# Altium PCB HU_revB.PcbDoc (part 2 of 5)
Units mm, origin at the board's own origin, x right, y up, seen from the top; angles counter-clockwise.
Board outline 164 x 90 mm, 6 copper layers (TOP, GND1, INT SIG, PWR + INT SIG, GND2, BOT), stack 1.538 mm thick; 404 components, 380 nets, 1687 pads, 328 vias.
Unrouted connection lines stored in the file: 342.
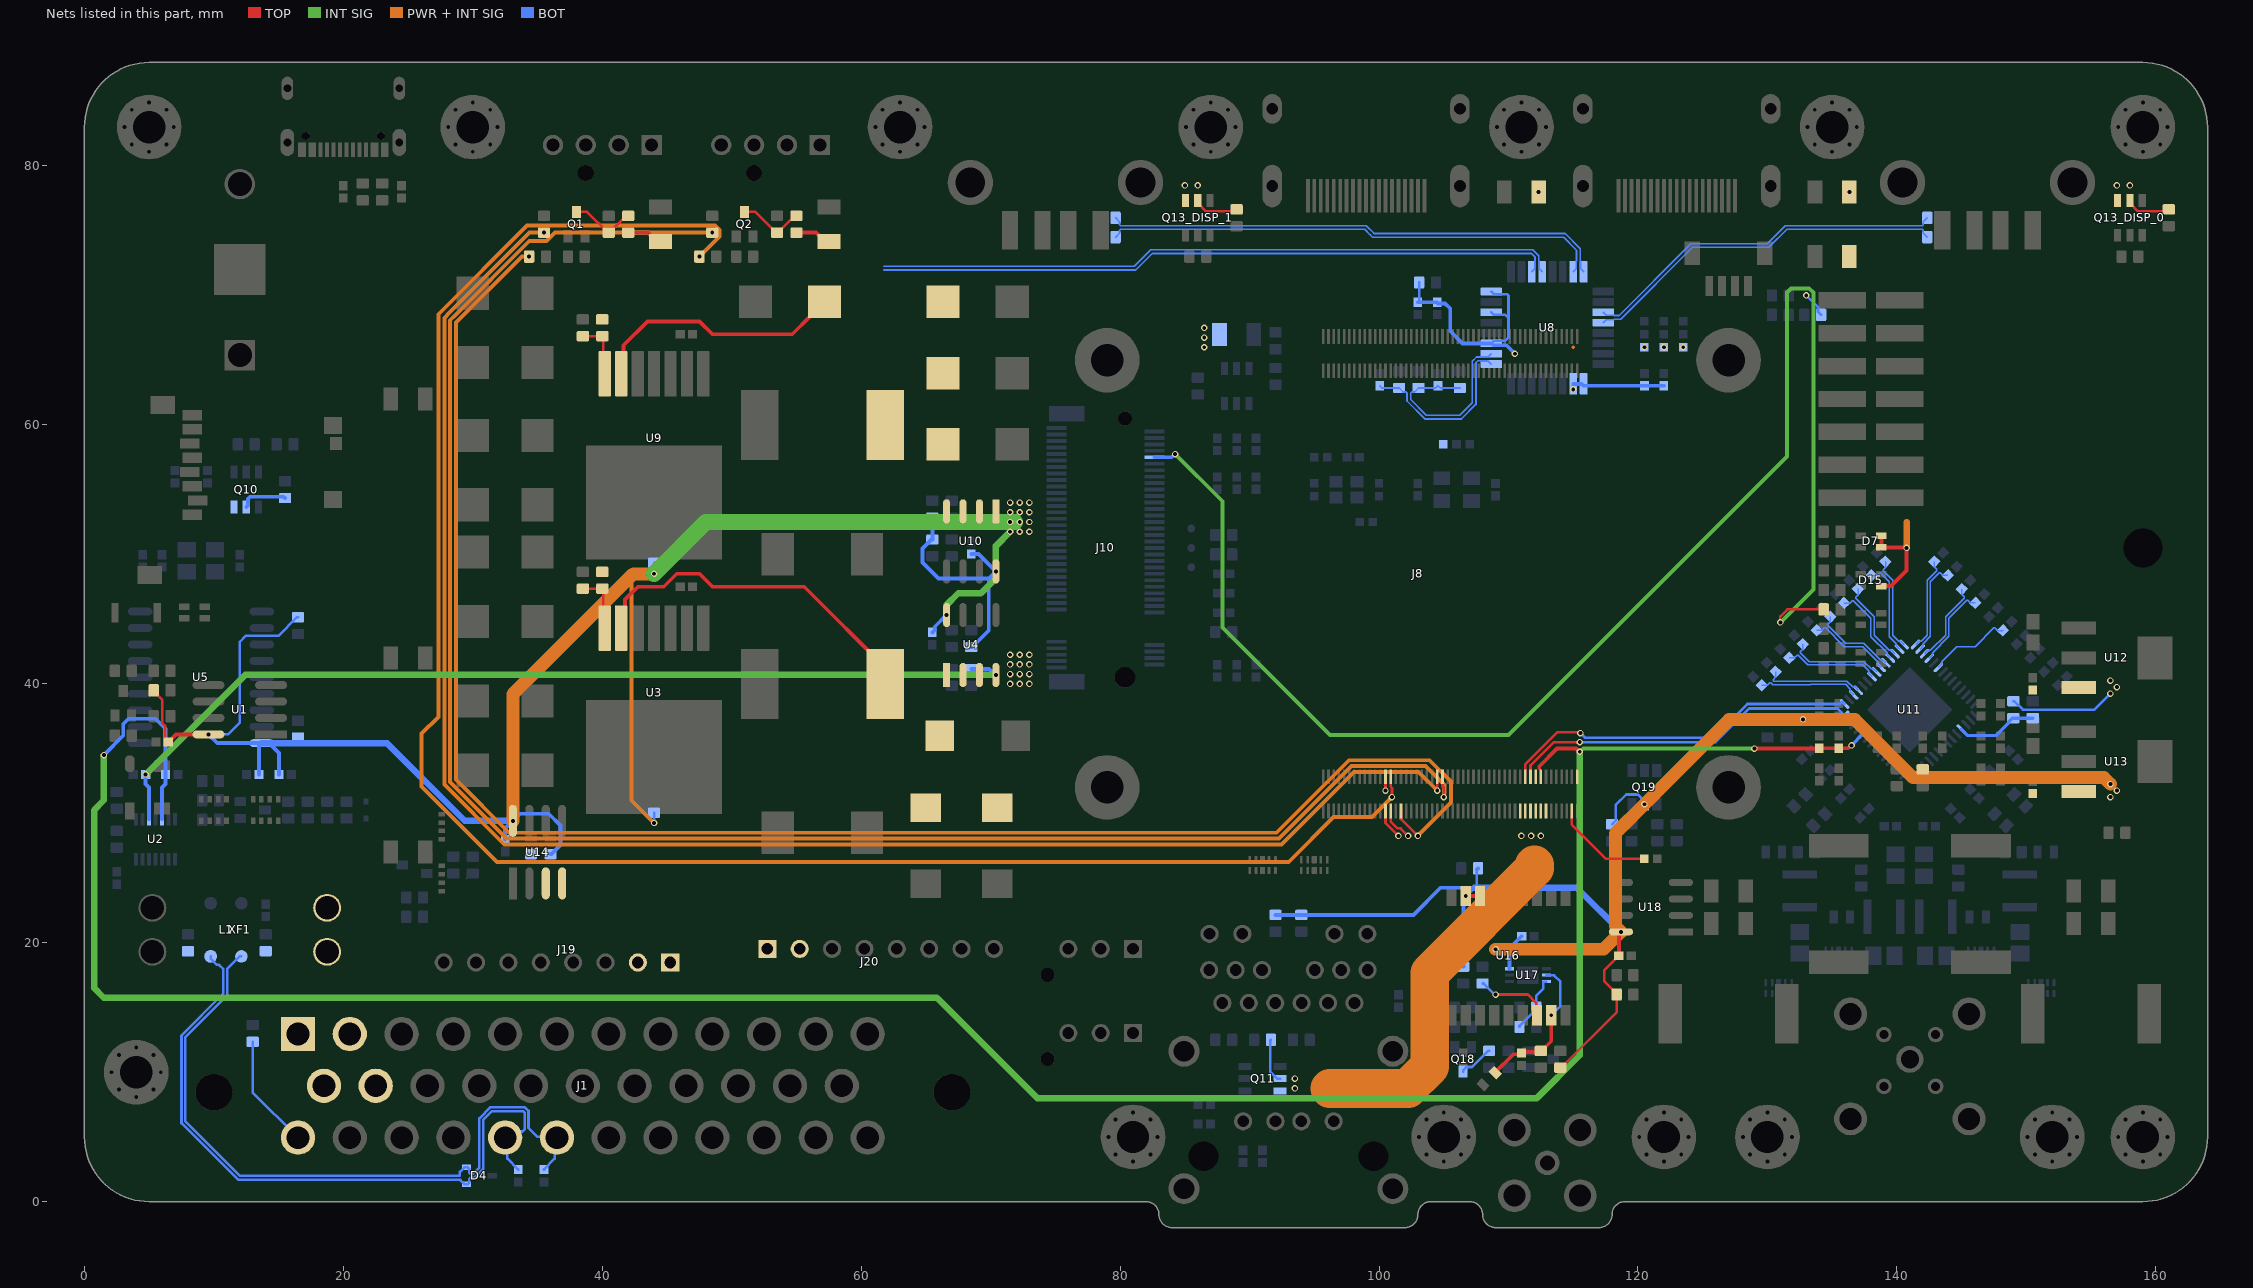
[diagram p6: the nets of this part, all layers, seen from the top]

## Footprints (in the part's own frame and the unit in brackets; to place one, negate y for a bottom-side part, rotate by r counter-clockwise, add the part's x,y. Pads: shape width x height; smd on the part's side, far side on the other; paste and mask are expansions set on the pad) (continued)
MAX-M10M-00B-Footprint-1 [mm]
  rect 1.55x0.8 smd: 1(-4.6,4.4) 2(-4.6,3.3) 3(-4.6,2.2) 4(-4.6,1.1) 5(-4.6,0) 6(-4.6,-1.1) 7(-4.6,-2.2) 8(-4.6,-3.3) 9(-4.6,-4.4) 10(4.6,-4.4) 11(4.6,-3.3) 12(4.6,-2.2) 13(4.6,-1.1) 14(4.6,0) 15(4.6,1.1) 16(4.6,2.2) 17(4.6,3.3) 18(4.6,4.4)
  silkscreen extent -5.26,4.91 -5.16,5.01, body extent -4.85,-5.35 4.85,5.05, height 2.7
MOLX-473521001_V [mm] "SMD, 8-Leads, Body 15.2x14mm, Pitch 1.1mm"
  rect 0.8x1.5 smd: 1(1.94,-3.66) 2(0.84,-3.26) 3(-0.26,-3.66) 4(-1.36,-3.86) 5(-2.46,-3.66) 6(-3.56,-3.86) 7(-4.66,-3.66) 8(-5.76,-3.66)
  rect 1x0.95 smd: 9(-3.56,7.425)
  rect 1.3x1.4 smd: 10(-4.95,7.2) 11(0.75,7.2)
  rect 1.4x1.9 smd: 12(6.6,-6.95) 13(-6.55,-5.95)
  silkscreen extent -7,-7.6 7.77,7.6, body extent -7.05,-7.6 7.05,7.6, height 1.85
MTC16_L [mm] "TSOP, 16-Leads, Body 5x4.4mm, Pitch 0.65mm, IPC High Density"
  oval 1.4x0.35 smd: 1(-2.8,2.275) 2(-2.8,1.625) 3(-2.8,0.975) 4(-2.8,0.325) 5(-2.8,-0.325) 6(-2.8,-0.975) 7(-2.8,-1.625) 8(-2.8,-2.275) 9(2.8,-2.275) 10(2.8,-1.625) 11(2.8,-0.975) 12(2.8,-0.325) 13(2.8,0.325) 14(2.8,0.975) 15(2.8,1.625) 16(2.8,2.275)
  silkscreen extent -2.92,-2.55 1.7,3.12, body extent -2.25,-2.55 2.25,2.55, height 1.1
"New footprint 1" [mm]
  round 0.6 smd paste-1: 1(0,0)
ONSC-SOD-123-2-425-04_V [mm] "SOD, 2-Leads, Body 2.69x1.6mm"
  rect 0.91x1.22 smd: 1(-1.635,0) 2(1.635,0)
  silkscreen extent -1.76,-0.8 0.78,1.29, body extent -1.35,-0.8 1.35,0.8, height 1.35
ONSC-SOD-523-2-502-01_V [mm] "SOD, 2-Leads, Body 1.2x0.8mm"
  rect 0.48x0.4 smd: 1(-0.66,0) 2(0.66,0)
  silkscreen extent -0.75,-0.4 0.07,0.65, body extent -0.6,-0.4 0.6,0.4, height 0.7
"PTHV6 M2" [mm]
  round 0.5 hole 0.3: 1(-1.9,0) 1(-1.344,-1.344) 1(-1.344,1.344) 1(0,-1.9) 1(0,1.9) 1(1.344,-1.344) 1(1.344,1.344) 1(1.9,0)
  round 5 hole 2.5: 1(0,0)
R0603B [mm] "Chip Resistor, 0603, 2-Leads, Body 1.58x0.85mm, IPC Medium Density"
  rrect25% 0.8x0.95 smd: 1(-0.65,0) 2(0.65,0)
  silkscreen extent -0.2,-0.7 0.2,0.7, body extent -0.82,-0.48 0.82,0.48, height 0.5
RESC1005X40X25ML05T05 [mm] "Chip Resistor, 2-Leads, Body 1.00x0.50mm, IPC Low Density"
  rect 0.65x0.65 smd: 1(-0.5,0) 2(0.5,0)
  body extent -0.53,-0.27 0.53,0.28, height 0.4
RESC1608X90X30ML15T20 [mm] "Chip Resistor, 2-Leads, Body 1.60x0.80mm, IPC Low Density"
  rect 0.95x1.05 smd: 1(-0.7,0) 2(0.7,0)
  body extent -0.88,-0.48 0.87,0.48, height 0.9
"RPI CM5 W_ COOLER-Footprint-1" [mm]
  rect 0.2x1.14 smd paste-2 mask+0: 1(31.3,34.82) 2(31.3,32.18) 3(30.9,34.82) 4(30.9,32.18) 5(30.5,34.82) 6(30.5,32.18) 7(30.1,34.82) 8(30.1,32.18) 9(29.7,34.82) 10(29.7,32.18) 11(29.3,34.82) 12(29.3,32.18) 13(28.9,34.82) 14(28.9,32.18) 15(28.5,34.82) 16(28.5,32.18) 17(28.1,34.82) 18(28.1,32.18) 19(27.7,34.82) 20(27.7,32.18) 21(27.3,34.82) 22(27.3,32.18) 23(26.9,34.82) 24(26.9,32.18) 25(26.5,34.82) 26(26.5,32.18) 27(26.1,34.82) 28(26.1,32.18) 29(25.7,34.82) 30(25.7,32.18) 31(25.3,34.82) 32(25.3,32.18) 33(24.9,34.82) 34(24.9,32.18) 35(24.5,34.82) 36(24.5,32.18) 37(24.1,34.82) 38(24.1,32.18) 39(23.7,34.82) 40(23.7,32.18) 41(23.3,34.82) 42(23.3,32.18) 43(22.9,34.82) 44(22.9,32.18) 45(22.5,34.82) 46(22.5,32.18) 47(22.1,34.82) 48(22.1,32.18) 49(21.7,34.82) 50(21.7,32.18) 51(21.3,34.82) 52(21.3,32.18) 53(20.9,34.82) 54(20.9,32.18) 55(20.5,34.82) 56(20.5,32.18) 57(20.1,34.82) 58(20.1,32.18) 59(19.7,34.82) 60(19.7,32.18) 61(19.3,34.82) 62(19.3,32.18) 63(18.9,34.82) 64(18.9,32.18) 65(18.5,34.82) 66(18.5,32.18) 67(18.1,34.82) 68(18.1,32.18) 69(17.7,34.82) 70(17.7,32.18) 71(17.3,34.82) 72(17.3,32.18) 73(16.9,34.82) 74(16.9,32.18) 75(16.5,34.82) 76(16.5,32.18) 77(16.1,34.82) 78(16.1,32.18) 79(15.7,34.82) 80(15.7,32.18) 81(15.3,34.82) 82(15.3,32.18) 83(14.9,34.82) 84(14.9,32.18) 85(14.5,34.82) 86(14.5,32.18) 87(14.1,34.82) 88(14.1,32.18) 89(13.7,34.82) 90(13.7,32.18) 91(13.3,34.82) 92(13.3,32.18) 93(12.9,34.82) 94(12.9,32.18) 95(12.5,34.82) 96(12.5,32.18) 97(12.1,34.82) 98(12.1,32.18) 99(11.7,34.82) 100(11.7,32.18) 101(31.3,0.82) 102(31.3,-1.82) 103(30.9,0.82) 104(30.9,-1.82) 105(30.5,0.82) 106(30.5,-1.82) 107(30.1,0.82) 108(30.1,-1.82) 109(29.7,0.82) 110(29.7,-1.82) 111(29.3,0.82) 112(29.3,-1.82) 113(28.9,0.82) 114(28.9,-1.82) 115(28.5,0.82) 116(28.5,-1.82) 117(28.1,0.82) 118(28.1,-1.82) 119(27.7,0.82) 120(27.7,-1.82) 121(27.3,0.82) 122(27.3,-1.82) 123(26.9,0.82) 124(26.9,-1.82) 125(26.5,0.82) 126(26.5,-1.82) 127(26.1,0.82) 128(26.1,-1.82) 129(25.7,0.82) 130(25.7,-1.82) 131(25.3,0.82) 132(25.3,-1.82) 133(24.9,0.82) 134(24.9,-1.82) 135(24.5,0.82) 136(24.5,-1.82) 137(24.1,0.82) 138(24.1,-1.82) 139(23.7,0.82) 140(23.7,-1.82) 141(23.3,0.82) 142(23.3,-1.82) 143(22.9,0.82) 144(22.9,-1.82) 145(22.5,0.82) 146(22.5,-1.82) 147(22.1,0.82) 148(22.1,-1.82) 149(21.7,0.82) 150(21.7,-1.82) 151(21.3,0.82) 152(21.3,-1.82) 153(20.9,0.82) 154(20.9,-1.82) 155(20.5,0.82) 156(20.5,-1.82) 157(20.1,0.82) 158(20.1,-1.82) 159(19.7,0.82) 160(19.7,-1.82) 161(19.3,0.82) 162(19.3,-1.82) 163(18.9,0.82) 164(18.9,-1.82) 165(18.5,0.82) 166(18.5,-1.82) 167(18.1,0.82) 168(18.1,-1.82) 169(17.7,0.82) 170(17.7,-1.82) 171(17.3,0.82) 172(17.3,-1.82) 173(16.9,0.82) 174(16.9,-1.82) 175(16.5,0.82) 176(16.5,-1.82) 177(16.1,0.82) 178(16.1,-1.82) 179(15.7,0.82) 180(15.7,-1.82) 181(15.3,0.82) 182(15.3,-1.82) 183(14.9,0.82) 184(14.9,-1.82) 185(14.5,0.82) 186(14.5,-1.82) 187(14.1,0.82) 188(14.1,-1.82) 189(13.7,0.82) 190(13.7,-1.82) 191(13.3,0.82) 192(13.3,-1.82) 193(12.9,0.82) 194(12.9,-1.82) 195(12.5,0.82) 196(12.5,-1.82) 197(12.1,0.82) 198(12.1,-1.82) 199(11.7,0.82) 200(11.7,-1.82)
  round 5 hole 2.5: 201(0,0) 202(0,33) 203(48,33) 204(48,0)
  silkscreen extent 10.2,-3.1 32.8,35, body extent -3.5,-3.5 51.5,36.5, height 5.01
SISH615ADN-T1-GE3-Footprint-1 [mm]
  rect 0.35x0.5 smd paste+0 mask+0: 1(-0.937,-1.4) 2(-0.288,-1.4) 3(0.363,-1.4) 4(1.012,-1.4)
  round 0.025 smd mask+0: 5-6-7-8(0.038,0.51)
  TOP region: -1.187,-0.63 -1.187,-0.215 -1.568,-0.215 -1.568,0.215 -1.187,0.215 -1.187,1.35 -1.137,1.35 -1.137,1.65 -0.737,1.65 -0.737,1.35 -0.487,1.35 -0.487,1.65 -0.088,1.65 -0.088,1.35 0.163,1.35 0.163,1.65 0.563,1.65 0.563,1.35 0.813,1.35 0.813,1.65 1.212,1.65 1.212,1.35 1.262,1.35 1.262,0.215 1.643,0.215 1.643,-0.215 1.262,-0.215 1.262,-0.63
  silkscreen extent -1.51,-2.37 1.59,-1.01, body extent -1.67,-1.75 1.74,1.75, height 0.25
SOT95P284X110-6N [mm] "SOT23, 6-Leads, Body 2.98x2.84mm, Pitch 0.95mm, IPC Medium Density"
  rect 1x0.55 smd: 1(-1.35,0.95) 2(-1.35,0) 3(-1.35,-0.95) 4(1.35,-0.95) 5(1.35,0) 6(1.35,0.95)
  silkscreen extent -1.47,-1.55 0.45,1.9, body extent -0.85,-1.55 0.85,1.55, height 1.1
SOT-223_M [mm] "SOT223, 4-Leads, Body 6.5x3.5mm, Pitch 2.3mm, Lead Span 7mm, IPC Low Density"
  rect 2.7x1 smd: 1(-2.95,2.3) 2(-2.95,0) 3(-2.95,-2.3)
  rect 2.7x3.3 smd: 4(2.95,0)
  silkscreen extent -3.07,-3.35 1.3,3.47, body extent -1.85,-3.35 1.85,3.35, height 1.8
T495D106M035ATE260-Footprint-1 [mm]
  rect 2.56x2.5 smd paste+0 mask+0: 1(-2.672,0) 2(2.672,0)
  silkscreen extent -5.23,-2.28 3.93,2.28, body extent -3.8,-2.15 3.8,2.15, height 3.15
T495D337K010ATE150-Footprint-1 [mm]
  rect 2.56x2.5 smd paste+0 mask+0: 1(-2.672,0) 2(2.672,0)
  silkscreen extent -5.2,-2.28 3.93,2.28, body extent -3.8,-2.15 3.8,2.15, height 3.15
T495D475K050ATE300-Footprint-1 [mm]
  rect 2.56x2.5 smd paste+0 mask+0: 1(-2.672,0) 2(2.672,0)
  silkscreen extent -5.2,-2.28 3.93,2.28, body extent -3.8,-2.15 3.8,2.15, height 3.15
TCAN1146DYYRQ1-Footprint-1 [mil]
  rect 38.5x12 smd paste+0 mask+0: 1(-60.75,59.07) 2(-60.75,39.38) 3(-60.75,19.69) 4(-60.75,0) 5(-60.75,-19.69) 6(-60.75,-39.38) 7(-60.75,-59.07) 8(60.75,-59.07) 9(60.75,-39.38) 10(60.75,-19.69) 11(60.75,0) 12(60.75,19.69) 13(60.75,39.38) 14(60.75,59.07)
  silkscreen extent -47,-90 100,90, body extent -66,-84 66,84, height 43
VF0032A_M [mm] "QFP, 32-Leads, Body 7x7mm, Pitch 0.8mm, IPC Low Density"
  rrect17% 1.65x0.6 smd: 1(-4.325,2.8) 2(-4.325,2) 3(-4.325,1.2) 4(-4.325,0.4) 5(-4.325,-0.4) 6(-4.325,-1.2) 7(-4.325,-2) 8(-4.325,-2.8) 17(4.325,-2.8) 18(4.325,-2) 19(4.325,-1.2) 20(4.325,-0.4) 21(4.325,0.4) 22(4.325,1.2) 23(4.325,2) 24(4.325,2.8)
  rrect17% 0.6x1.65 smd: 9(-2.8,-4.325) 10(-2,-4.325) 11(-1.2,-4.325) 12(-0.4,-4.325) 13(0.4,-4.325) 14(1.2,-4.325) 15(2,-4.325) 16(2.8,-4.325) 25(2.8,4.325) 26(2,4.325) 27(1.2,4.325) 28(0.4,4.325) 29(-0.4,4.325) 30(-1.2,4.325) 31(-2,4.325) 32(-2.8,4.325)
  silkscreen extent -4.45,-3.1 3.1,3.77, body extent -4.51,-4.51 4.51,4.51, height 1.6
WE-TPC_1038 [mm] "Power Inductor, SMD, 2-Leads, body 10x10mm"
  rect 4.6x1.8 smd: 1(0,4.5) 2(0,-4.5)
  silkscreen extent -5,-4.5 5,6.02, body extent -5,-5 5,5, height 3.8
WL-SBCD_0606 [mm] "SMT Bi-color Chip LED Diffuesed, body 1.5x1.6mm"
  rect 0.5x0.8 smd: 1(-0.45,0.8) 2(-0.45,-0.8) 3(0.45,-0.8) 4(0.45,0.8)
  silkscreen extent -0.07,1.47 0.07,1.62, body extent -0.75,-0.8 0.75,0.8, height 0.55

## Part data
BT1: library part CMP-2000-05463-1, "Holder Battery Coin, 12 mm, 2-Pin THD, RoHS", Manufacturer=Keystone, Package Description="2-Pin Through Hole Device, Body 13.21 x 12.07 mm", Datasheet URL=https://datasheet.ciiva.com/3/3001-3954.pdf, Datasheet Version="Rev. H, 09/2006", Manufacturer URL=http://www.keyelco.com/, Mounting Technology=ThroughHole, Package Reference=3001
C1 C2 C3 C4 C5 C6 C7 C8 C9 C10 C11 C19 C20 C21 C22 C23 C24 C25 C26 C27 C28 C29 C30 C31 C32 C33 C34 C35 C36 C37 C38 C39 C40 C41 C42 C43 C46 C47 C48 C49 C50 C51 C52 C53 C54 C55 C56 C57 C58 C59 C60 C61 C70 C71 C72 C73 C74 C75 C76 C77 C78 C79 C80 C82 C84 C85 C86 C87 C88 C89 C90 C91 C92 C93 C94 C95 C96 C97 C98 C99 C104 C106 C107 C108 C109 C110 C111 C112 C113 C114 C115 C116 C117 C118 C119 C120 C121 C122 C123 C124 C125 C126 C127 C128 C129 C130 C131 C132 C133: library part CMP-001-00058-1, "LARGE PADS, 0402 CAP, CHANGE COMMENT TO MATCH REAL P/N", Capacitor Type=Ceramic, Case/Package=0402, Max Operating Temperature=85°C, Min Operating Temperature=-55°C, Mounting Technology="Surface Mount", Pins=2, RoHS Compliant=Yes
C12 C13 C14 C15: library part CMP-001-00065-3, "Tantalum Capacitor, Polarized, Tantalum (dry/solid), 35V, 20% +Tol, 20% -Tol, 10uF, Surface Mount, 2917", Case/Package=Molded, Max Operating Temperature=125°C, Min Operating Temperature=-55°C, Tolerance=20%, Mounting Technology="Surface Mount"
C16 C17 C18: library part CMP-2000-07208-1, "Capacitor, Tantalum, 150 uF, +/- 10%, 10 V, -55 to 125 degC, 2-Pin SMD, RoHS, Tape and Reel", Capacitance=150µF, Capacitance Tolerance=±10%, Capacitor Case Style=2917, Capacitor Terminals=SMD, Manufacturer=Kemet, Operating Temperature Range=-55°Cto+125°C, Package Description="2-Pin Surface Mount Device, Body 7.3 x 4.3 mm", Package Reference=T495-D, Voltage Rating=10V, Datasheet URL=http://capacitoredge.kemet.com/capedge2/DataSheet/Datasheet-T495D157K010ATE100.pdf?pn=T495D157K010ATE100, Datasheet Version=09/2016, ESR=0.1ohm, Manufacturer URL=http://www.kemet.com/, Mounting Technology=SurfaceMount, MSL=MSL1-Unlimited
C62 C63 C64 C65: library part CMP-001-00066-2, "Cap Tant Solid 4.7uF 50V D CASE 10% (7.3 X 4.3 X 2.8mm) SMD 7343-31 0.3 Ohm 125 C T/R", Case/Package=7343-31, Max Operating Temperature=125°C, Min Operating Temperature=-55°C, Tolerance=10%, Voltage Rating=50V, Mounting Technology="Surface Mount", Pins=2
C66 C67 C68 C69: library part CMP-001-00067-2, "330uF Solid MnO2 Tantalum Capacitor, 10 V dc +/-10%, T495 Series", Case/Package=2917, Max Operating Temperature=125°C, Min Operating Temperature=-55°C, Tolerance=10%, Voltage Rating=10V, Mounting Technology="Surface Mount"
C81 C83: library part CMP-2006-02792-2, "Chip Multilayer Ceramic Capacitors for General Purpose, 0603, 10uF, X5R, 15%, 20%, 6.3V", Capacitance=10uF, Case Code (Imperial)=0603, Case Code (Metric)=1608, Dielectric=X5R, Max Operating Temperature=85°C, Min Operating Temperature=-55°C, Package Quantity=4000, Tolerance=20%, Voltage=6.3V, Case/Package=0603, Depth=0.8mm, Height=0.8mm, Lead Free="Lead Free", Length=1.6mm, Material=Ceramic, Mount="Surface Mount", Packaging="Tape and Reel", Radiation Hardening=No, REACH SVHC="No SVHC", Termination=SMD/SMT, Thickness=0.035inch, Voltage Rating=6.3V, Voltage Rating (DC)=6.3V, Width=0.031inch
C100 C101 C102 C103: library part CMP-2007-03222-3, "Chip Multilayer Ceramic Capacitors for General Purpose, 0805, 22uF, X5R, 15%, 20%, 25V", Capacitance=22uF, Case Code (Imperial)=0805, Case Code (Metric)=2012, Dielectric=X5R, Max Operating Temperature=85°C, Min Operating Temperature=-55°C, Package Quantity=3000, Resistor Type=Ceramic, Tolerance=20%, Voltage=25V, Case/Package=0805, Depth=1.25mm, Height=1.25mm, Lead Free="Lead Free", Length=2mm, Material=Ceramic, Mount="Surface Mount", Packaging="Tape and Reel", REACH SVHC="No SVHC", Termination=SMD/SMT, Thickness=0.057inch, Voltage Rating=25V, Voltage Rating (DC)=25V, Weight=0.000335oz, Width=1.25mm
D1: library part CMP-1060-00565-1, "Zener Voltage Regulator, 500 mW, 2-Pin SOD-123, Pb-Free, Tape and Reel", Manufacturer="On Semiconductor", ComponentLink1Description="Manufacturer URL", ComponentLink1URL=http://www.onsemi.com/, ComponentLink2Description=Datasheet, ComponentLink2URL=http://www.onsemi.com/pub_link/Collateral/MMSZ5221BT1-D.PDF, ComponentLink3Description="Package Specification", ComponentLink3URL=http://www.onsemi.com/pub_link/Collateral/425-04.PDF, DatasheetVersion="Rev. 12", Mounting Technology="Surface Mount", P Max (W)=0.5, PackageDescription="2-Pin SOD, Body 1.6 x 2.69 mm", PackageReference=SOD-123-2-425-04, PackageVersion="Rev. G, 10/2009", Packing="Tape and Reel", PartNumber=MMSZ5242BT1G, RoHS=Pb-Free, VZ Typ (V)=12
D2: library part CMP-1060-00750-1, "Zener Voltage Regulator, 500 mW, 2-Pin SOD-523, Pb-Free, Tape and Reel", Manufacturer="On Semiconductor", PartNumber=MM5Z3V3T1G, ComponentLink1Description="Manufacturer URL", ComponentLink1URL=http://www.onsemi.com/, ComponentLink2Description=Datasheet, ComponentLink2URL=http://www.onsemi.cn/pub_link/Collateral/MM5Z2V4T1-D.PDF, ComponentLink3Description="Package Specification", ComponentLink3URL=http://www.onsemi.com/pub_link/Collateral/502-01.PDF, DatasheetVersion="Rev. 10", Mounting Technology="Surface Mount", P Max (W)=0.5, PackageDescription="2-Pin SOD, Body 1.2 x 0.8 mm", PackageReference=SOD-523-2-502-01, PackageVersion="Rev. E, 09/2010", Packing="Tape and Reel", RoHS=Pb-Free, VZ Typ (V)=3.3
D3: library part CMP-2000-04993-2, "DIODE GEN PURP 100V 150MA SOD123", Average Rectified Current=150mA, Capacitance=4pF, Forward Voltage=1V, Max Forward Surge Current (Ifsm)=1A, Max Operating Temperature=150°C, Max Repetitive Reverse Voltage (Vrrm)=100V, Max Reverse Leakage Current=5uA, Max Surge Current=2A, Min Operating Temperature=-65°C, Package Quantity=3000, Power Dissipation=400mW, Current Rating=150mA, Element Configuration=Single, Forward Current=150mA, Height=1.2mm, Lead Free="Lead Free", Length=2.85mm, Max Reverse Voltage (DC)=100V, Mount="Surface Mount", Number of Pins=2, Output Current=150mA, Packaging="Tape and Reel", Peak Non-Repetitive Surge Current=2A, Polarity=Standard, Radiation Hardening=No, Recovery Time=4ns, Reverse Recovery Time=4ns, Voltage Rating (DC)=100V, Width=1.8mm
D4: library part CMP-12225-000055-1, "TVS DIODE 26.5V 44V SOT323-3", Breakdown Voltage=28.5V, Capacitance=3pF, Clamping Voltage=44V, Manufacturer=STMicroelectronics, Max Junction Temp=+175°C, Package=SOT323-3L, Peak Pulse Current=3A, Peak Pulse Power=170W, Reverse Standoff Voltage=26.5V, Temperature="-55°C to +175°C", Temperature Range Low=-55°C, Automotive=Yes, Automotive Grade="Grade 0", Category=Diode, ComponentLink2Description=Datasheet, ComponentLink2URL=https://www.st.com/resource/en/datasheet/esdcan02-2bwy.pdf, Device Class L1="Circuit Protection", Device Class L2="TVS Diodes", Device Class L3=unset, Digikey Description="TVS DIODE 26.5V 44V SOT323-3", Direction=Bidirectional, Height=1.1mm, Ipc Land Pattern Name=SOT65P210X95-3, Lead Free=Yes, Manufacturer Part Number=ESDCAN02-2BWY, Mouser Description="TVS Diodes / ESD Suppressors Automotive dual-line Transil, Transient voltage suppressor (TVS) for CAN bus", Number of Channels=2, Octopart=https://octopart.com/esdcan02-2bwy-stmicroelectronics-58631133, RoHS=TRUE, Standoff Height=0mm, Temperature Range High=+175°C
D5 D6 D11 D12 D13 D14: library part CMP-04989-000002-1, "4-CHANNEL LOW-CAPACITANCE SURGE", Ambient Temperature Range High=+125°C, Ambient Temperature Range Low=-40°C, Breakdown Voltage=5.5V, Capacitance=0.55pF, Clamping Voltage=11.5V, Manufacturer="Texas Instruments", Package=DQA0010A, Peak Pulse Current=5.5A, Peak Pulse Power=50W, Reverse Standoff Voltage=3.6V, Temperature="-40°C to +125°C", Automotive=No, Category=Diode, ComponentLink2Description=Datasheet, ComponentLink2URL=http://www.ti.com/lit/ds/symlink/esd204.pdf, Device Class L1="Circuit Protection", Device Class L2="TVS Diodes", Device Class L3=unset, Digikey Description="4-CHANNEL LOW-CAPACITANCE SURGE", Direction=Bidirectional, Height=0.55mm, Lead Free=Yes, Manufacturer Part Number=ESD204DQAR, Mouser Description="4-Channel Low-Capacitance Surge and ESD Protection Diode 10-USON -40 to 125", Number of Channels=4, Octopart=https://octopart.com/esd204dqar-texas+instruments-89917476, RoHS=TRUE, Standoff Height=0mm, Temperature Range High=+125°C, Temperature Range Low=-40°C
D7 D9 D15 D16 D17: library part CMP-004-00040-2, "Led, Red/Grn, 180Mcd/230Mcd, 624Nm/525Nm Rohs Compliant: Yes", Component Type=Standard, Design Item ID=CMP-004-00034-2, Pins=4, Source=rgled.SchLib
D8 D10: library part CMP-2000-05097-3, "DIODE SCHOTTKY 40V 5A SMC", Capacitance=300pF, Forward Current=5A, Manufacturer="Diodes Inc.", Max Junction Temp=+150°C, Max Repetitive Reverse Voltage=40V, Max Surge Forward Current=100A, Package=SMC, Peak Reverse Current=0.5mA, Temperature="-55°C to +150°C", Temperature Range Low=-55°C, Automotive=No, Automotive Grade=NA, Category=Diode, ComponentLink2Description=Datasheet, ComponentLink2URL=https://www.diodes.com/assets/Datasheets/ds13012.pdf, Device Class L1="Discrete Semiconductors", Device Class L2=Diodes, Device Class L3="Schottky Diodes", Digikey Description="DIODE SCHOTTKY 40V 5A SMC", Footprint Url=https://www.diodes.com/assets/Package-Files/SMC.pdf, Height=2.5mm, Lead Free=Yes, Manufacturer Part Number=B540C-13-F, Mouser Description="Diode: Schottky rectifying; SMD; 40V; 5A; SMC; Package: reel, tape", Octopart=https://octopart.com/b540c-13-f-diodes+inc.-325873, Reverse Voltage=40V, RoHS=TRUE, Standoff Height=0.1mm, Temperature Range High=+150°C
F1 F2 F3 F4 F5 F6 F7 F10 F11_DISP_0 F11_DISP_1 F12 F13 F14 F15: library part CMP-16042-000006-1, "FUSE BOARD MNT 5A 63VAC/VDC 1206", RoHS Compliant=Yes
J1: library part CMP-03369-000154-1, "CONN HEADER R/A 35POS 4MM", Color=Black, Current Rating=17A, Flammability Rating="UL94 V-0", Max Operating Temperature=221°C, Max Voltage Rating (AC)=250V, Min Operating Temperature=-40°C, Package Quantity=1, Circuit Application=Power, Connector System=Wire-to-Device, Connector Type="Male Pin", Contact Material=Brass, Contact Plating=Tin, Contact Type="Male Pin", Depth=37.9mm, ELV=Compliant, Fastening Type=Ramp, Gender=Male, Height=32.1mm, Housing Material=Thermoplastic, Insulation=Insulated, Lead Free="Lead Free", Length=3.03inch, Mount="Through Hole", Number of Contacts=35, Number of Positions=35, Number of Rows=3, Number of Signal Positions=35, Orientation="Right Angle", Packaging=Bulk, PCB Mount Alignment="Yes (With)", PCB Mount Retention=With, PCB Thickness=0.062inch, Pitch=0.157inch, Primary Type=Rectangular, Radiation Hardening=No, RoHS Compliant=Yes, Row Spacing=0.157inch, Sealable="Yes (With)", Series=Ampseal, Shielding=Unshielded, Tab Thickness=1.3mm, Termination=Solder, Width=37.9mm
J2: library part CMP-17439-000370-1, "CONN HEADER SMD 4POS 1MM", Color=Natural, Flammability Rating="UL94 V-0", Package Quantity=1, Voltage Rating=50V, Connector Type=Header, Contact Finish - Mating=TIN, Contact Material="Copper Alloy", Contact Plating=Tin, Contact Shape=Square, Contact Type="Male Pin", Fastening Type=Pull, Insulation Color=Natural, Insulation Material=Nylon, Lead Free="Lead Free", Mated Stacking Heights=4.9mm, Mount="Surface Mount", Number of Positions=4, Number of Rows=1, Packaging="Cut Tape", Pitch=0.039inch, Series=SR, Termination=Solder
J3 J4: library part CMP-04776-000290-2, "CONN HEADER VERT 4POS 2.54MM", Ambient Temperature Range High=105°C, Current Rating=500mA, Housing Color=Beige, Manufacturer Lifecycle Status=ACTIVE, Max Operating Temperature=75°C, Min Operating Temperature=0°C, Voltage Rating=250V, Contact Material="Brass, Copper", Contact Plating=Tin, Country of Origin=HK, Depth=5.84mm, Gender=Male, Glow Wire Compliant=Non-compliant, Halogen Free="Low Halogen", Height=7.7mm, Housing Material=Nylon, Lead Pitch=2.54mm, Length=10.2mm, Lifecycle Status=Production, Mount="Through Hole", NexarPartId=854935, Number of Circuits=4, Number of Contacts=4, Number of Pins=4, Number of Positions=4, Number of Rows=1, Orientation=Vertical, Packaging=Bulk, Pitch=2.54mm, Plating=Copper, Radiation Hardening=No, REACH SVHC=Unknown, RoHS=Compliant, Schedule B="8536694040, 8536694040", Termination="Through Hole", Voltage Rating (DC)=250V
J5: library part CMP-002-00044-4, "Connector RF Mini-FAKRA Plug 9GHz 50Ohm Solder Right Angle Through Hole", Component Type=Standard, Design Item ID=CMP-002-00085-1, Pins=9, Source=fakra4ch.SchLib
J6: library part CMP-002-00092-1, "Modular Connectors / Ethernet Connectors CONN MAGJACK 1PORT 1000 BASE-T", Max Operating Temperature=85°C, Min Operating Temperature=-40°C, Connector Type="RJ45, USB", Mounting Technology="Through Hole"
J7: library part CMP-002-00091-1, "USB Connector, USB Type C, USB 2.0, Receptacle, 24 Ways, Surface Mount, Through Hole Mount", Pins=24
J8: library part CMP-00028-00005-4, "Mechanical placeholder for RPI CM5 w/ active cooler on it"
J9: library part CMP-002-00093-2, "Conn.; Rect./PCB; Header; 14 Circuit; SMT; Dual Row; Vertical; C-Grid Series; Gold Plate", Max Operating Temperature=105°C, Min Operating Temperature=-40°C, Gender=Male, Mounting Technology="Surface Mount", Pins=14
J10: library part CMP-03365-000001-1, "CONN EDGE DUAL FMALE 67POS 0.020", Current Rating=0.5A, Manufacturer=TE, Temperature="-40°C to +80°C", Temperature Range High=+80°C, Temperature Range Low=-40°C, Voltage Rating=50V, Automotive=No, Category=Conn, ComponentLink2Description=Datasheet, ComponentLink2URL=http://www.te.com/commerce/DocumentDelivery/DDEController?Action=showdoc&DocId=Specification+Or+Standard%7F114-115006%7FB%7Fpdf%7FEnglish%7FENG_SS_114-115006_B_114-115006_REV_B.pdf%7F1-2199230-6, Conn Gender=Female, Conn Orientation="Right Angle", Contact Material=Gold,Tin, Device Class L1=Connectors, Device Class L2="Card Edge Connectors", Device Class L3=unset, Digikey Description="CONN EDGE DUAL FMALE 67POS 0.020", Footprint Url=http://www.te.com/commerce/DocumentDelivery/DDEController?Action=showdoc&DocId=Customer+Drawing%7F2199230%7FB2%7Fpdf%7FEnglish%7FENG_CD_2199230_B2.pdf%7F1-2199230-6, Height=4.2mm, Is Female=yes, Lead Free=Yes, Manufacturer Part Number=1-2199230-6, Number of Contacts=67, Number of Rows=2, Octopart=https://octopart.com/1-2199230-6-te+connectivity-34969376, Package=1-2199230-6, Pitch=0.5mm, RoHS=TRUE
J13_DISP_0 J13_DISP_1: library part CMP-002-00089-3, "HDMI CONNECTOR, RCPT, 19POS, SMT; Available until stocks are exhausted Alternative available", Max Operating Temperature=85°C, Min Operating Temperature=-20°C, Gender=Female, Pins=19
J14_DISP_0 J14_DISP_1: library part CMP-03360-000008-1, "CONN RCPT USB2.0 TYPEA 4P SMD RA", Current Rating=1A, Manufacturer="TE Connectivity", Temperature="-55°C to +85°C", Temperature Range High=+85°C, Temperature Range Low=-55°C, Voltage Rating=30V, Automotive=No, Category=Conn, ComponentLink2Description=Datasheet, ComponentLink2URL=https://www.te.com/usa-en/product-292303-7.html?te_bu=Cor&te_type=other&te_campaign=oct_glo_cor-oct-global-oth-prtnr-fy19-oct-octo-buy-bom_sma-298_2&elqCampaignId=35216, Conn Orientation="Right Angle", Contact Material=Gold,Nickel, Device Class L1=Connectors, Device Class L2="USB Connectors", Device Class L3=unset, Digikey Description="CONN RCPT USB2.0 TYPEA 4P SMD RA", Is Female=yes, Lead Free=Yes, Manufacturer Part Number=292303-7, Mouser Description="USB Connectors USB A R/A Recpt Assy SMT", Number of Contacts=4, Octopart=https://octopart.com/292303-7-te+connectivity-42840369, Package=292303-7, RoHS=TRUE, Shielding=true, Usb Standard="USB 2.0"
J16: library part CMP-002-00054-1, "RF F Connector, Male, Board Mount, Solder Terminal, Plug", Connector Type="RF F CONNECTOR", Mounting Technology=Board, RoHS Compliant=Yes
J17 J18: library part CMP-17438-000009-1, "CONN HEADER VERT 3POS 2.5MM", Color=Natural, Contact Resistance=20mR, Housing Color=White, Max Current Rating=3A, Max Operating Temperature=85°C, Max Voltage Rating (AC)=250V, Min Operating Temperature=-25°C, Connector Type="Male Pin", Contact Material=Brass, Contact Plating=Tin, Contact Type="Male Pin", Depth=5.75mm, Fastening Type=Detent, Gender=Male, Housing Material=Polyamide, Lead Free="Lead Free", Length=9.9mm, Mount="Through Hole", Number of Positions=3, Number of Rows=1, Orientation=Straight, Packaging=Bulk, Pitch=0.098inch, Series=XH, Termination=Press-Fit
J19 J20: library part CMP-17439-000637-1, "CONN HEADER VERT 8POS 2.5MM", Color=Green, Flammability Rating="UL94 V-0", Insulation Color=Natural, Voltage Rating=250V, Connector Type=Header, Contact Finish - Mating=TIN, Contact Material=Brass, Contact Plating=Tin, Contact Shape=Square, Contact Type="Male Pin", Fastening Type=Detent, Insulation Material=Nylon, Lead Free="Lead Free", Mated Stacking Heights=9.8mm, Mount="Through Hole", Number of Positions=8, Number of Rows=1, Packaging=Bulk, Pitch=2.5mm, Series=XH, Termination=Press-Fit
L1: library part CMP-07251-000006-1, "CMC 51UH 200MA 2LN 2KOHM SMD", Case/Package=4532, Current=200mA, DC Resistance (DCR)=3.5R, Inductance=51uH, Insulation Resistance=10MR, Max Operating Temperature=125°C, Min Operating Temperature=-40°C, Package Quantity=1, Resistance=2kR, Self Resonant Frequency=100kHz, Tolerance=50%, Voltage Rating (DC)=50V, Contact Plating=Tin, Core Material=Ferrite, Current Rating=200mA, DC Current=200mA, Depth=3.4mm, Element Configuration=Dual, Height=0.118inch, Impedance=2kR, Lead Free="Lead Free", Length=4.5mm, Material=Steel, Max DC Current=200mA, Mount="Surface Mount", Number of Lines=2, Packaging="Tape and Reel", REACH SVHC="No SVHC", RoHS Compliant=Yes, Series=SRF4532, Termination=SMD/SMT, Test Frequency=100kHz, Width=0.126inch
L2 L3: library part CMP-2000-07146-2, "FIXED IND 15UH 5A 27 MOHM SMD", Case/Package=1260, Current Rating=5A, DC Resistance (DCR)=27mR, Frequency=17.6MHz, Inductance=15uH, Inductance Tolerance=20%, Max Operating Temperature=125°C, Min Operating Temperature=-40°C, Package Quantity=600, Resistance=27MR, Resistor Type=Wirewound, Saturation Current=4.6A, Test Frequency=100kHz, Core Material=Ferrite, DC Current=5A, Depth=12.8mm, Height=6mm, Height - Seated (Max)=0.256inch, Length=12.5mm, Material=Steel, Max DC Current=5A, Military Standard=Not, Mount="Surface Mount", Number of Pins=2, Packaging="Tape and Reel", Q Factor=25, REACH SVHC="No SVHC", RMS Current (Irms)=5A, RoHS Compliant=Yes, Sample Rate (Hz)=100kHz, Self Resonant Frequency=17.6MHz, Series=SRR1260, Shielding=Shielded, Termination=SMD/SMT, Tolerance=20%, Width=12.5mm
L4 L7 L10 L13: library part CMP-0227-00094-3, Ambient Temperature Range High=95°C, Ambient Temperature Range Low=-40°C, Case/Package=Nonstandard, Current Rating=1.2A, DC Resistance (DCR)=255mΩ, Inductance=100µH, Inductance Tolerance=30%, Max Operating Temperature=125°C, Self Resonant Frequency=6MHz, Test Frequency=100kHz, Composition=Wirewound, Core Material=Ferrite, Depth=10mm, Height=3.8mm, Height - Seated (Max)=4.0894mm, Length=10mm, Max DC Current=1.2A, Min Operating Temperature=-40°C, Mount="Surface Mount", NexarPartId=8917123, Number of Pins=2, Packaging="Cut Tape (CT)", REACH SVHC=Unknown, Resistance=255mΩ, RMS Current (Irms)=1.2A, RoHS=Compliant, Saturation Current=1.2A, Shielding=Shielded, Termination=SMD/SMT, Tolerance=30%, Weight=1.273007g, Width=10mm
L5 L8 L11 L14: library part CMP-11268-000041-1, "NOT COILCRAFT - ACTUAL P# --> ADL32VHC-220M /  - Power Injection Chokes for PoC", Ambient Temperature Range High=+125°C, Ambient Temperature Range Low=-40°C, Inductance=22uH, Manufacturer=coilcraft, Manufacturer Part Number=1210POC-223MRC, Package=1210POC, Rms Current=700mA, Saturation Current=720mA, Self Resonant Frequency=70MHz, Series Resistance=0.88Ω, Test Frequency=100kHz, Tolerance=20%, Automotive=Yes, Automotive Grade="Grade 1", Category=Ind, ComponentLink2Description=Datasheet, ComponentLink2URL=https://drive.google.com/open?id=15FlOq8Y4YbRFohfA_cJ40jgnqs8va2Mh, Core Material=Ferrite, Device Class L1="Passive Components", Device Class L2=Inductors, Device Class L3="Fixed Inductors", Height=3mm, Lead Free=Yes, Octopart=https://octopart.com/1210poc-223mrc-coilcraft-103207315, RoHS=TRUE
L6 L9 L12 L15: library part CMP-11268-000007-1, "Fixed Inductors PFL1609 Low Profile 0.56 uH 20 % 1.4 A", Ambient Temperature Range High=+105°C, Ambient Temperature Range Low=-40°C, Inductance=0.56uH, Manufacturer=coilcraft, Package=PFL1609, Rms Current=1100mA, Saturation Current=710mA, Self Resonant Frequency=600MHz, Series Resistance=130mΩ, Test Frequency=7.9MHz, Tolerance=20%, Automotive=Yes, Automotive Grade="Grade 1", Category=Ind, ComponentLink2Description=Datasheet, ComponentLink2URL=https://www.coilcraft.com/pdfs/pfl1609.pdf, Composition=Wirewound, Core Material=Composite, Device Class L1="Passive Components", Device Class L2=Inductors, Device Class L3="Fixed Inductors", Height=0.95mm, Lead Free=Yes, Manufacturer Part Number=PFL1609-561MEW, Mouser Description="Fixed Inductors PFL1609 Low Profile 0.56 uH 20 % 1.4 A", Octopart=https://octopart.com/pfl1609-561mew-coilcraft-20329171, RoHS=TRUE, Shielding=true
L16: library part CMP-06042-013840-1, "Wire Wound RF Inductor 27nH ±5% 440mA 0.21Ω 0603 (1608)", Case Code (Imperial)=0603, Case Code (Metric)=1608, Current Rating=440mA, DC Resistance (DCR)=210mR, Inductance=27nH, Max Operating Temperature=125°C, Min Operating Temperature=-55°C, Package Quantity=4000, Resistor Type=Wirewound, Self Resonant Frequency=3.7GHz, Test Frequency=100MHz, Tolerance=5%, Case/Package=0603, Core Material=Non-Magnetic, DC Current=440mA, Depth=1mm, Height=0.8mm, Height - Seated (Max)=0.039inch, Lead Free="Lead Free", Length=1.6mm, Max DC Current=440mA, Military Standard=Not, Mount="Surface Mount", Packaging="Tape and Reel", Q Factor=40, Radiation Hardening=No, Shielding=Unshielded, Termination=SMD/SMT, Weight=0.000106oz, Width=0.8mm
MH1 MH2 MH3 MH4 MH5 MH6 MH7 MH8 MH9 MH10 MH11 MH12 MH13 MH14: library part CMP-00028-00001-11, "Plated mounting hole with 6 peripheral vias. This is a generic symbol that groups all relevant footprints."
MP1: library part CMP-03913-59774857-1, "9774025243R Spacer Material: Steel, Tin-Plated Mounting: SMT Series: WA-SMST Thread D: M2", Max Operating Temperature=150°C, Min Operating Temperature=-55°C, Height=2.5mm, Length=2.5mm, Material=Steel, NexarPartId=59774857, Outside Diameter=4.3434mm, Packaging="Tape and Reel", Plating=Tin, REACH SVHC=Unknown, RoHS=Compliant, Threaded/Unthreaded=Threaded
Q1 Q2 Q7 Q8 Q16 Q18: library part CMP-2000-05968-1, "N-Channel Enhancement Mode Mosfet, 50 V, 200 mA, -55 to 150 degC, 6-Pin SOT-323, RoHS, Tape and Reel", Id - Continuous Drain Current=200mA, Manufacturer=DiodesIncorporated, Maximum Operating Temperature=+150C, Minimum Operating Temperature=-55C, Package / Case=SOT-323-3, Package Description="3-Pin Small Outline Transistor, Body 2 x 1.25 mm, Pitch 0.65 mm", Package Reference=SOT323, Pd - Power Dissipation=200mW, Rds On - Drain-Source Resistance=1.4Ohms, Vds - Drain-Source Breakdown Voltage=75V, Vgs - Gate-Source Voltage=20V, Brand=DiodesIncorporated, Channel Mode=Enhancement, Configuration=Single, Datasheet URL=http://www.diodes.com/_files/datasheets/ds30206.pdf, Datasheet Version="Rev. 11-2, 09/2013", Factory Pack Quantity=3000, Forward Transconductance - Min=0.1S, Height=1mm, Length=2.2mm, Manufacturer URL=http://www.diodes.com/, Mounting Style=SMD/SMT, Mounting Technology=SurfaceMount, Number of Channels=1Channel, Packaging=Reel, Product=MOSFETSmallSignal, Product Category=MOSFET, RoHS=True, Series=BSS138, Technology=Si, Transistor Polarity=N-Channel, Transistor Type=1N-Channel, Type=EnhancementModeFieldEffectTransistor, Typical Turn-Off Delay Time=20ns, Typical Turn-On Delay Time=20ns, Unit Weight=0.000212oz, Width=1.35mm
Q3 Q4 Q5 Q6 Q14 Q15: library part CMP-013-00018-2, "Trans MOSFET P-CH 20V 22.1A 8-Pin PowerPAK 1212 EP T/R", Component Type=Standard, Design Item ID=CMP-013-00036-4, Pins=5, Source=SISH615ADN-T1-GE3.SchLib
Q9 Q10 Q11 Q13_DISP_0 Q13_DISP_1: library part CMP-019-00054-1, "Power Switch ICs – Power Distribution; VISHAY; SIP32510DT-T1-GE3; 1; 1; 5.5 V; SOT-23-6", Case/Package=SOT-23-6, Max Operating Temperature=85°C, Max Power Dissipation=833mW, Max Supply Voltage=5.5V, Min Operating Temperature=-40°C, Min Supply Voltage=1.2V, Mounting Technology="Surface Mount"
Q17: library part CMP-2000-06170-1, "P-Channel Enhancement Mode MOSFET, 310 mW, 20 V, -55 to 150 degC, 3-Pin SOT-323, RoHS, Tape and Reel", Drain-Source On Resistance-Max=750mO, Drain-to-Source Voltage [Vdss]=20V, Manufacturer="Diodes Inc", Package Description="3-Pin Small Outline Transistor, Body 2 x 1.25 mm, Pitch 0.65 mm", Package Reference=SOT323, Rated Power Dissipation=310mW, Channel Type=P-Channel, Datasheet URL=http://www.diodes.com/_files/datasheets/ds31861.pdf, Datasheet Version="Rev. 3-2, 09/2013", Manufacturer URL=http://www.diodes.com/, Mounting Technology=SurfaceMount, Qg Gate Charge=0.622nC
Q19: library part CMP-2000-04939-1, "Dual N & P-Channel 2.5 V Specified PowerTrench(TM) MOSFET, -55 to 150 degC, 6-Pin SOT-23, RoHS, Tape and Reel", Manufacturer=Fairchild, Maximum Continuous Drain Current=2.7@NChannel, Maximum Drain Source Voltage=20V, Maximum Gate Source Voltage=±8V, Operating Temperature=-55to150degC, Package=6SuperSOT, Package Description="6-Pin Small Outline Transistor, Body 2.9 x 1.6 mm, Pitch 0.95 mm", Package Reference=SOT23-6, Package Version="Rev. 5, 05/2015", Category=MOSFET, Channel Mode=Enhancement, Channel Type=N, Datasheet URL=https://www.fairchildsemi.com/datasheets/FD/FDC6327C.pdf, Datasheet Version="Rev. E, 07/2000", Manufacturer URL=https://www.fairchildsemi.com/, Mounting=SurfaceMount, Package URL=https://www.fairchildsemi.com/package-drawings/MA/MA06A.pdf, Packaging=Tape&Reel, Rad Hard=No, RDS-on=80@4.5V@NChannel, Typical Fall Time=3@NChannel, Typical Rise Time=9@NChannel, Typical Turn-Off Delay Time=12@NChannel, Typical Turn-On Delay Time=5@NChannel
R1 R2 R3 R4 R5 R6 R7 R8 R9 R10 R11 R12 R13 R14 R15 R16 R17 R18 R19 R20 R21 R22 R23 R24 R25 R26 R27 R28 R29 R30 R32 R33 R34 R35 R39 R40 R41 R42 R43 R44 R45 R46 R47 R52 R53 R54 R55 R56 R57 R59 R60 R61 R62 R63 R64 R65_DISP_0 R65_DISP_1 R66_DISP_0 R66_DISP_1 R67 R69 R71 R73 R74 R76 R79 R82 R83 R84 R85 R86 R88 R89 R90 R91 R92 R93 R94 R95 R96 R97 R98 R99 R100 R101 R102 R103 R104 R105 R106 R107 R108 R109 R110 R111 R112 R116 R117 R118 R119 R120 R121 R122 R123 R124 R125 R126 R127 R128 R129 R130 R131 R132 R133 R134 R135 R136 R137 R138 R139 R140 R141 R142 R143 R144: library part CMP-009-00002-14, "Resistor"
R31 R58 R87: library part CMP-2000-00869-1, Manufacturer=Panasonic, Part Number=ERT-J1VR103J
R36 R37 R38 R48 R49 R50 R51 R68 R70 R72 R75 R77 R78 R80 R81 R115 R145: library part CMP-009-00118-2, "READ THE NAME", Component Type=Standard, Design Item ID=CMP-009-00206-2, Pins=2, Source=0402jump.SchLib
SD1: library part CMP-2000-05848-1, "MicroSD(TM), Pitch 1.1 mm, 8 Position, Height 1.88 mm, -20 to 85 degC, RoHS, Tape and Reel", Manufacturer=Molex, Package Description="MicroSD(TM), Pitch 1.1 mm, 8 Position, Height 1.88 mm", Datasheet URL=http://www.molex.com/pdm_docs/sd/473521001_sd.pdf, Datasheet Version="Rev. G, 01/2012", Manufacturer URL=http://www.molex.com/, Mounting Technology=SurfaceMount, Package Reference=473521001
SW1: library part CMP-10040-000029-1, "SWITCH TACTILE SPST-NO 0.02A 15V", Current Rating=5A, Flammability Rating="UL94 V-0", Insulation Color=Black, Max Operating Temperature=85°C, Min Operating Temperature=-40°C, Operating Force=240gf, Actuator Type=Standard, Connector Type=USB, Contact Plating=Gold, Gender=Receptacle, Illumination Type=Non-Illuminated, Mechanical Life=500000Cycles, Mount="Surface Mount", Number of Contacts=24, Number of Ports=1, Packaging="Tape and Reel", Switch Function=Off-Mom, Switch Travel=0.13mm, Termination=Solder, Throw Configuration=SPST
TP1 TP2 TP3 TP4: library part CMP-00025-2, "Test Point .6mm"
U1 U14: library part CMP-1557-00015-2, "SENSOR CURRENT HALL 25A AC/DC", Case/Package=SOIC, Current Sensing=25A, Frequency=100kHz, Max Operating Temperature=125°C, Max Supply Current=5.5mA, Max Supply Voltage=5.5V, Min Operating Temperature=-40°C, Min Supply Voltage=3V, Operating Supply Voltage=3.3V, Package Quantity=1, Quiescent Current=4mA, -3db Bandwidth=100kHz, Accuracy=4%, Bandwidth=100kHz, Height=1.5mm, Length=4.9mm, Linearity=1%, Number of Channels=1, Number of Pins=8, Packaging="Tape and Reel", Polarity=Bidirectional, REACH SVHC="No SVHC", Response Time=4.6us, RoHS Compliant=Yes, Sensitivity=55mV/A, Series=-, Width=3.9mm
U2: library part CMP-318-000000-2, "Automotive CAN FD transceiver with watchdog, bus diagnostics and partial networking via sele 14-SOT-23-THIN -40 to 150", Component Type=Standard, Design Item ID=CMP-015-00012-2, Pin Count=14, Source=TCAN1146DYYRQ1.SchLib
U3: library part CMP-0069-00190-3, "SIMPLE SWITCHER® High Efficiency 5A Step-Down Voltage Regulator, 7-pin TO-263", Manufacturer="Texas Instruments", PackageTopMarking=NSUZXYTTE#*LM2678*S-5.0, PowerWise=N, Code_JEDEC=MO-169-AC, ComponentLink1Description="Datasheet URL", ComponentLink1URL=http://www.ti.com/general/docs/lit/getliterature.tsp?genericPartNumber=LM2678&fileType=pdf, CompType=Switcher, PackageDescription="TO-263, Molded, .400 x .390 x .180in Body, 7 Lead, .050in Pitch, Surface Mount", PackageReference=KTW0007B, PinCount=7, RoHS=N
U4 U10 U18: library part CMP-1557-00012-2, "SENSOR CURRENT HALL 12.5A AC/DC", Case/Package=SOIC, Current Sensing=12.5A, Frequency=100kHz, Max Operating Temperature=125°C, Max Supply Current=5.5mA, Max Supply Voltage=5.5V, Min Operating Temperature=-40°C, Min Supply Voltage=3V, Operating Supply Voltage=3.3V, Package Quantity=1, Quiescent Current=4mA, -3db Bandwidth=100kHz, Accuracy=5%, Bandwidth=100kHz, Height=1.5mm, Length=4.9mm, Linearity=1%, Number of Channels=1, Number of Pins=8, Packaging="Tape and Reel", Polarity=Bidirectional, REACH SVHC="No SVHC", Response Time=4.6us, RoHS Compliant=Yes, Sensitivity=110mV/A, Series=-, Width=3.9mm
U5: library part CMP-0186-00133-3, "IC CAN CONTROLLER W/SPI 18SOIC", Ambient Temperature Range High=+125°C, Ambient Temperature Range Low=-65°C, Manufacturer=Microchip, Max Supply Voltage=5.5V, Min Supply Voltage=2.7V, Nominal Supply Current=10mA, Package=C04-051, Temperature="-40°C to +85°C", Temperature Range High=+85°C, Temperature Range Low=-40°C, Automotive=No, Category=IC, ComponentLink2Description=Datasheet, ComponentLink2URL=http://ww1.microchip.com/downloads/en/DeviceDoc/MCP2515-Stand-Alone-CAN-Controller-with-SPI-20001801J.pdf, Device Class L1="Integrated Circuits (ICs)", Device Class L2="Interface ICs", Device Class L3=Controllers, Digikey Description="IC CAN CONTROLLER W/SPI 18SOIC", Footprint Url=http://ww1.microchip.com/downloads/en/DeviceDoc/18L_SOIC_Wide_7.50_SO_C04-0051D.pdf, Function=Controller, Height=2.65mm, Interface=SPI,CAN, Ipc Land Pattern Name=SOIC127P1030X265-18, Lead Free=Yes, Manufacturer Part Number=MCP2515-I/SO, Mouser Description="CAN Interface IC W/ SPI Interface", Octopart=https://octopart.com/mcp2515-i%2Fso-microchip-430187, RoHS=TRUE, Standoff Height=0.1mm
U6 U7: library part CMP-0054-00372-2, "8-Channel, 50 kSPS to 200 kSPS, 8-Bit A/D Converter, 16-pin TSSOP, Pb-Free", Manufacturer="National Semiconductor", PackageTopMarking=NSUZXYTT*88S022*CIMT, PowerWise=Y, Code_JEDEC=MO-153-AB, ComponentLink1Description="ADC088S022 Datasheet", ComponentLink1URL=http://www.national.com/ds/AD/ADC088S022.pdf, ComponentLink2Description="ADC088S022 Web Page", ComponentLink2URL=http://www.national.com/pf/AD/ADC088S022.html, ComponentLink3Description="MTC16 Package Page", ComponentLink3URL=http://www.national.com/packaging/folders/mtc16.html, CompType="ADC IC", DatasheetVersion=Feb-2010, PackageDescription="Molded TSSOP, Jedec, 5 x 4.4 x 0.9mm Body, 16 Lead, 0.65mm Pitch", PackageReference=MTC16, PackageVersion="revD, Jun-2003", PinCount=16, RevisionNote="Component URLs added", RoHS=Y
U8: library part CMP-0309-00082-2, "2 / 3-Port Hub for USB with Optional Serial EEPROM Interface, 3.3V, 0 to 70 degC, 32-Pin LQFP (VF), Green (RoHS & no Sb/Br)", Manufacturer="Texas Instruments", Supply Voltage(s)(V)=3.3, ComponentLink1Description=Datasheet, ComponentLink1URL=http://www.ti.com/general/docs/lit/getliterature.tsp?genericPartNumber=TUSB2036&fileType=pdf, ComponentLink2Description="Package Specification", ComponentLink2URL=http://www.ti.com/litv/pdf/mtqf002b, DatasheetVersion=SLLS372E, Eco-Plan="Green (RoHS & no Sb/Br)", Integrated MCU Architecture=N/A, Mounting Technology="Surface Mount", PackageDescription="32-Pin Plastic Quad Flatpack, 7 x 7 mm Body, 0.8 mm Pitch", PackageReference=VF0032A, PackageVersion="revD, Apr-2000", PartNumber=TUSB2036VFR, SubFamily="USB Hub Controller", USB Full Speed=True, USB Speed=Full
U9: library part CMP-0069-00195-3, "SIMPLE SWITCHER® High Efficiency 5A Step-Down Voltage Regulator, 7-pin TO-263, Pb-Free", Manufacturer="Texas Instruments", PackageTopMarking=NSUZXYTTE#*LM2678*S-3.3, PowerWise=N, Code_JEDEC=MO-169-AC, ComponentLink1Description="Datasheet URL", ComponentLink1URL=http://www.ti.com/general/docs/lit/getliterature.tsp?genericPartNumber=LM2678&fileType=pdf, CompType=Switcher, PackageDescription="TO-263, Molded, .400 x .390 x .180in Body, 7 Lead, .050in Pitch, Surface Mount", PackageReference=KTW0007B, PinCount=7, RoHS=Y
U11: library part CMP-015-00011-2, "Quad Tunneling GMSL2/1 to CSI-2 Deserializer"
U12: library part CMP-0244-00308-1, "Fixed Low Drop Positive Voltage Regulator, 1.8V, 4-Pin SOT-223, Tape and Reel", ComponentLink1Description="Manufacturer URL", ComponentLink1URL=http://www.st.com, ComponentLink2Description=Datasheet, ComponentLink2URL=http://www.st.com/internet/com/TECHNICAL_RESOURCES/TECHNICAL_LITERATURE/DATASHEET/CD00000544.pdf, DatasheetVersion=1/11/2011, PackageDescription="4-Pin SOT-223 Package, 6.5 x 3.5 mm Body, 2.3 mm Pitch, 7 mm Lead Span", PackageReference=SOT-223, PackageVersion=2010
U13: library part CMP-0244-00318-1, "Fixed Low Drop Positive Voltage Regulator, 1.2V, 4-Pin SOT-223, Tape and Reel", ComponentLink1Description="Manufacturer URL", ComponentLink1URL=http://www.st.com, ComponentLink2Description=Datasheet, ComponentLink2URL=http://www.st.com/internet/com/TECHNICAL_RESOURCES/TECHNICAL_LITERATURE/DATASHEET/CD00000544.pdf, DatasheetVersion=1/11/2011, PackageDescription="4-Pin SOT-223 Package, 6.5 x 3.5 mm Body, 2.3 mm Pitch, 7 mm Lead Span", PackageReference=SOT-223, PackageVersion=2010
U16: library part CMP-010-00031-2, "Gnss Lcc Rx Mod, Rom, Crystal"
U17: library part CMP-09116-000039-1, "IC OPAMP GP 1 CIRCUIT 6DFN", Case/Package=DFN, Input Bias Current=12nA, Input Offset Voltage (Vos)=1.2mV, Max Operating Temperature=85°C, Max Supply Voltage=18V, Min Operating Temperature=-40°C, Min Supply Voltage=1.8V, Operating Supply Current=20uA, Output Current per Channel=10mA, Package Quantity=1, Power Supply Rejection Ratio (PSRR)=86dB, Voltage Gain=120dB, Bandwidth=60kHz, Common Mode Rejection Ratio=68dB, Gain Bandwidth Product=60kHz, Lead Free="Lead Free", Mount="Surface Mount", Number of Amplifiers=1, Number of Circuits=1, Number of Elements=1, Number of Pins=6, Packaging="Tape and Reel", REACH SVHC="No SVHC", Slew Rate=0.018V/µs, Unity Gain Bandwidth Product=60kHz
XF1: library part CMP-2000-05461-1, "FUSE HOLDER, PCB MOUNT, 500VAC, 20A, ROHS", Current Rating=30A, Manufacturer=Keystone-Electronics, Voltage=500V, Category=CircuitProtection, Contact Finish=TinNickel, Contact Material=Brass, Datasheet URL=http://datasheet.octopart.com/3557-2-Keystone-datasheet-15715937.pdf, Datasheet Version=Apr-13, Family=Fuseholders, For Use With/Related Products=ATC,ATO257,MINI897, Fuse Size="0.43\"Lx0.15\"Wx0.64\"H(10.92mmx3.81mmx16.25mm)", Fuse Type=Blade, Fuseholder Type=Block, Manufacturer URL=http://www.keyelco.com/, Mounting Type=PCB, Number of Circuits=1, Orientation=Vertical, Series=-, Termination Style=PCPin
Y1: library part CMP-27762-001115-1, "XTAL OSC XO 32.7680KHZ CMOS SMD", Case/Package=CSMD, Frequency=32.768kHz, Frequency Stability=25ppm, Load Capacitance=15pF, Max Operating Temperature=85°C, Max Supply Current=3.5mA, Min Operating Temperature=-40°C, Min Supply Voltage=2.97V, Operating Supply Voltage=3.3V, Depth=2mm, Height=0.037inch, Lead Free="Lead Free", Length=2.5mm, Mount="Surface Mount", Number of Pins=4, Packaging="Tape and Reel", Radiation Hardening=No, Series=ASDK, Termination=SMD/SMT, Width=0.079inch
Y2: library part CMP-27762-015134-1, "Crystal 16MHz ±30ppm (Tol) ±30ppm (Stability) 10pF FUND 80Ω 4-Pin SMD T/R", Case/Package=SMD/SMT, ESR (Equivalent Series Resistance)=80R, Frequency=16MHz, Frequency Stability=30ppm, Load Capacitance=10pF, Max Operating Temperature=60°C, Min Operating Temperature=-10°C, Depth=2.5mm, Frequency Tolerance=30ppm, Height=0.039inch, Lead Free="Lead Free", Length=3.2mm, Mount="Surface Mount", Number of Pins=4, Packaging="Tape and Reel", REACH SVHC="No SVHC", Series=ABM8G, Series Resistance=80R, Width=0.098inch
Y3: library part CMP-27762-011708-1, "Crystal 48MHz ±20ppm 18pF SMD-4 3.2mm x 2.5mm", Case/Package=CSMD, ESR (Equivalent Series Resistance)=35R, Frequency=48MHz, Frequency Stability=50ppm, Frequency Tolerance=20ppm, Load Capacitance=18pF, Max Operating Temperature=70°C, Min Operating Temperature=-20°C, Operating Frequency="48 MHz", Package Quantity=1000, Resistor Type=Ceramic, Depth=2.5mm, Height=0.031inch, Lead Free="Lead Free", Length=3.2mm, Mount="Surface Mount", Number of Pins=4, Packaging="Tape and Reel", Radiation Hardening=No, REACH SVHC="No SVHC", RoHS Compliant=Yes, Series=ABM8, Series Resistance=35R, Termination=SMD/SMT, Tolerance=20ppm, Width=0.098inch
Y4: library part CMP-2000-05733-3, "Crystal 25MHz ±20ppm (Tol) ±30ppm (Stability) 18pF FUND 60Ω 4-Pin SMD T/R", Case/Package=CSMD, ESR (Equivalent Series Resistance)=60R, Frequency=25MHz, Frequency Stability=30ppm, Frequency Tolerance=20ppm, Load Capacitance=18pF, Max Operating Temperature=85°C, Min Operating Temperature=-40°C, Operating Frequency="25 MHz", Package Quantity=1000, Depth=2.5mm, Height=0.039inch, Lead Free="Lead Free", Length=3.2mm, Mount="Surface Mount", Number of Pins=4, Packaging="Tape and Reel", Radiation Hardening=No, Series=ABM8G, Series Resistance=60R, Termination=SMD/SMT, Tolerance=20ppm, Width=0.098inch

## Via types
v1: diameter 0.5, hole 0.3, TOP to BOT, 308 vias
v2: diameter 0.5, hole 0.2, TOP to BOT, 16 vias
v3: diameter 0.75, hole 0.5, TOP to BOT, 4 vias

## Nets (pads, with @x,y where several pads share a name; then routed paths per layer and width w, separated by ;. In a path a pad name is that pad's centre, name@x,y a point inside that pad or via, vN(x,y) a via of type N, cw(c..) or ccw(c..) an arc to the next point about the centre after c; other vN are vias at no path point)
3V3_AUX: C2.1 C10.1 C29.1 C30.1 C31.1 C34.2 C37.2 C52.1 C53.1 C54.1 C55.1 C60.1 C80.2 C82.2 C104.1 C106.1 C107.1 C109.1 D7.2 D7.3 D15.2 F10.1 Q19.2 R8.1 R9.1 R11.2 R27.2 R28.1 R33.2 R52.1 R54.1 R55.1 R56.1 R57.1 R68.2 R70.2 R77.2 R78.2 R84.1 R89.2 R90.2 R93.2 R96.2 R97.2 R108.2 R116.1 R122.1 R131.1 R137.2 R144.2 U1.8 U4.8 U5.18 U6.2 U7.2 U8.3 U8.6 U8.8 U8.25 U8.26 U10.1 U10.2 U10.8 U12.3 U13.3 U14.8 U16.7 U16.8 U17.6 U18.8 | length 335.2
  TOP w0.2: R11.2@5.35,39.5 5.35,39.425 6,38.775 6,38.02 6,36.98 6.221,36.759 6.221,35.736 6.457,35.5 C2.1@6.479,35.5 ; R122.1@114,10.35 114.075,10.35 118.35,14.625 R144.2@118.35,16 118.35,16.075 117.4,17.025 117.4,17.879 118.264,18.742 118.264,18.764 118.5,19 C31.1@118.521,19
  TOP w0.3: C2.1@6.5,35.5 6.686,35.686 6.686,35.708 7.074,36.095 v1(9.584,36.095) ; v1(106.7,23.6) U16.7@107.8,23.6 ; C31.1@118.521,19 118.521,20.733 118.633,20.845 v1(118.684,20.845) ; D15.2@138.8,47.55 139.55,47.55 140.75,48.75 v1(140.75,50.5) 140.725,50.525 138.825,50.525 D7.2@138.8,50.55 D7.3@138.8,51.45
  INT SIG w0.5: v1(66.595,45.316) 66.595,46.095 67.5,47 69.25,47 70.405,48.155 v1(70.405,48.684) 70.405,50.655 v1(71.5,51.75)
  INT SIG w1.25: v1(44,48.5) 48,52.5 71.869,52.5
  PWR + INT SIG w0.3: 42.4,48.5 42.25,48.35 42.25,31 v1(44,29.25)
  PWR + INT SIG w0.5: v1(140.75,50.5) 140.75,52.5
  PWR + INT SIG w1: v1(33.095,29.416) 33.095,39.195 42.4,48.5 v1(44,48.5) ; v1(109,19.5) 117.339,19.5 v1(118.684,20.845) 118.25,21.279 118.25,28.45 v1(120.5,30.7) 127.05,37.25 v1(132.75,37.25) 136.75,37.25 141.25,32.75 156,32.75 v1(156.5,32.25)